# Altium PCB PCB1.PcbDoc
Units mm, origin at the board's own origin, x right, y up, seen from the top; angles counter-clockwise.
Board outline 67.94 x 45.72 mm, 2 copper layers (Top Layer, Bottom Layer); 32 components, 21 nets, 135 pads, 9 vias.
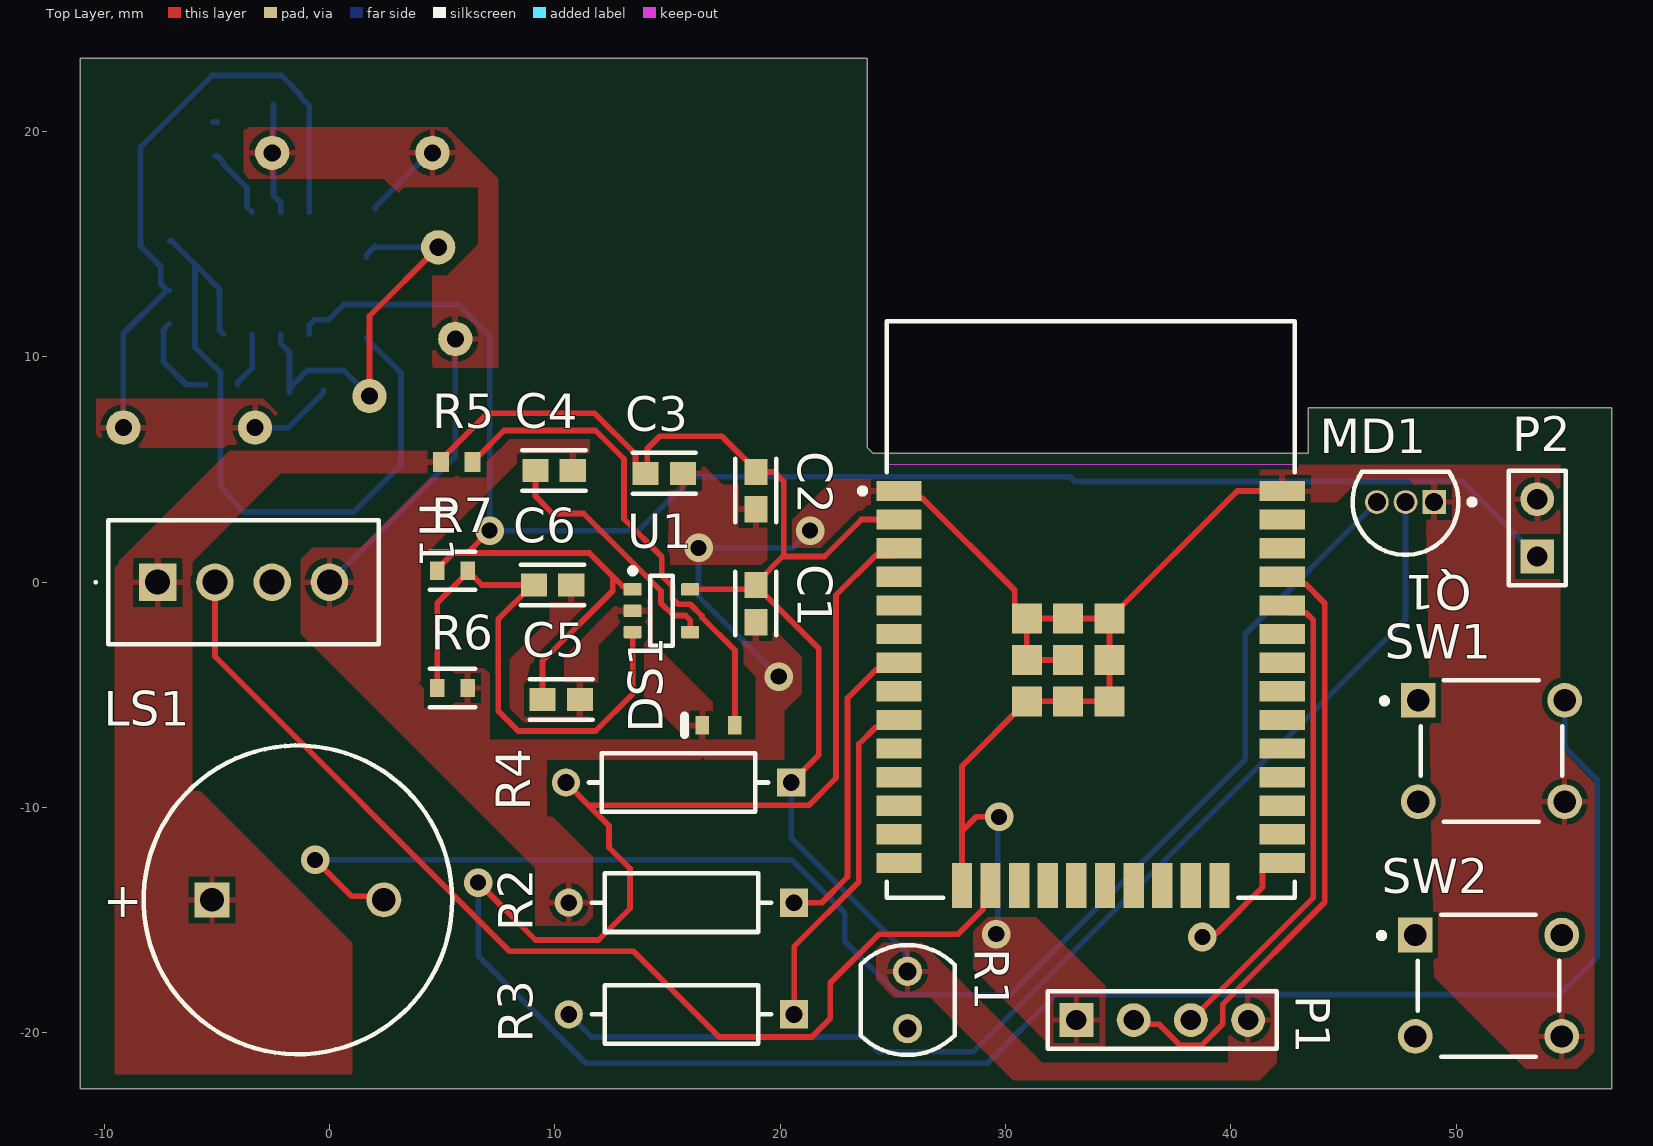
[diagram p0: Top Layer view]
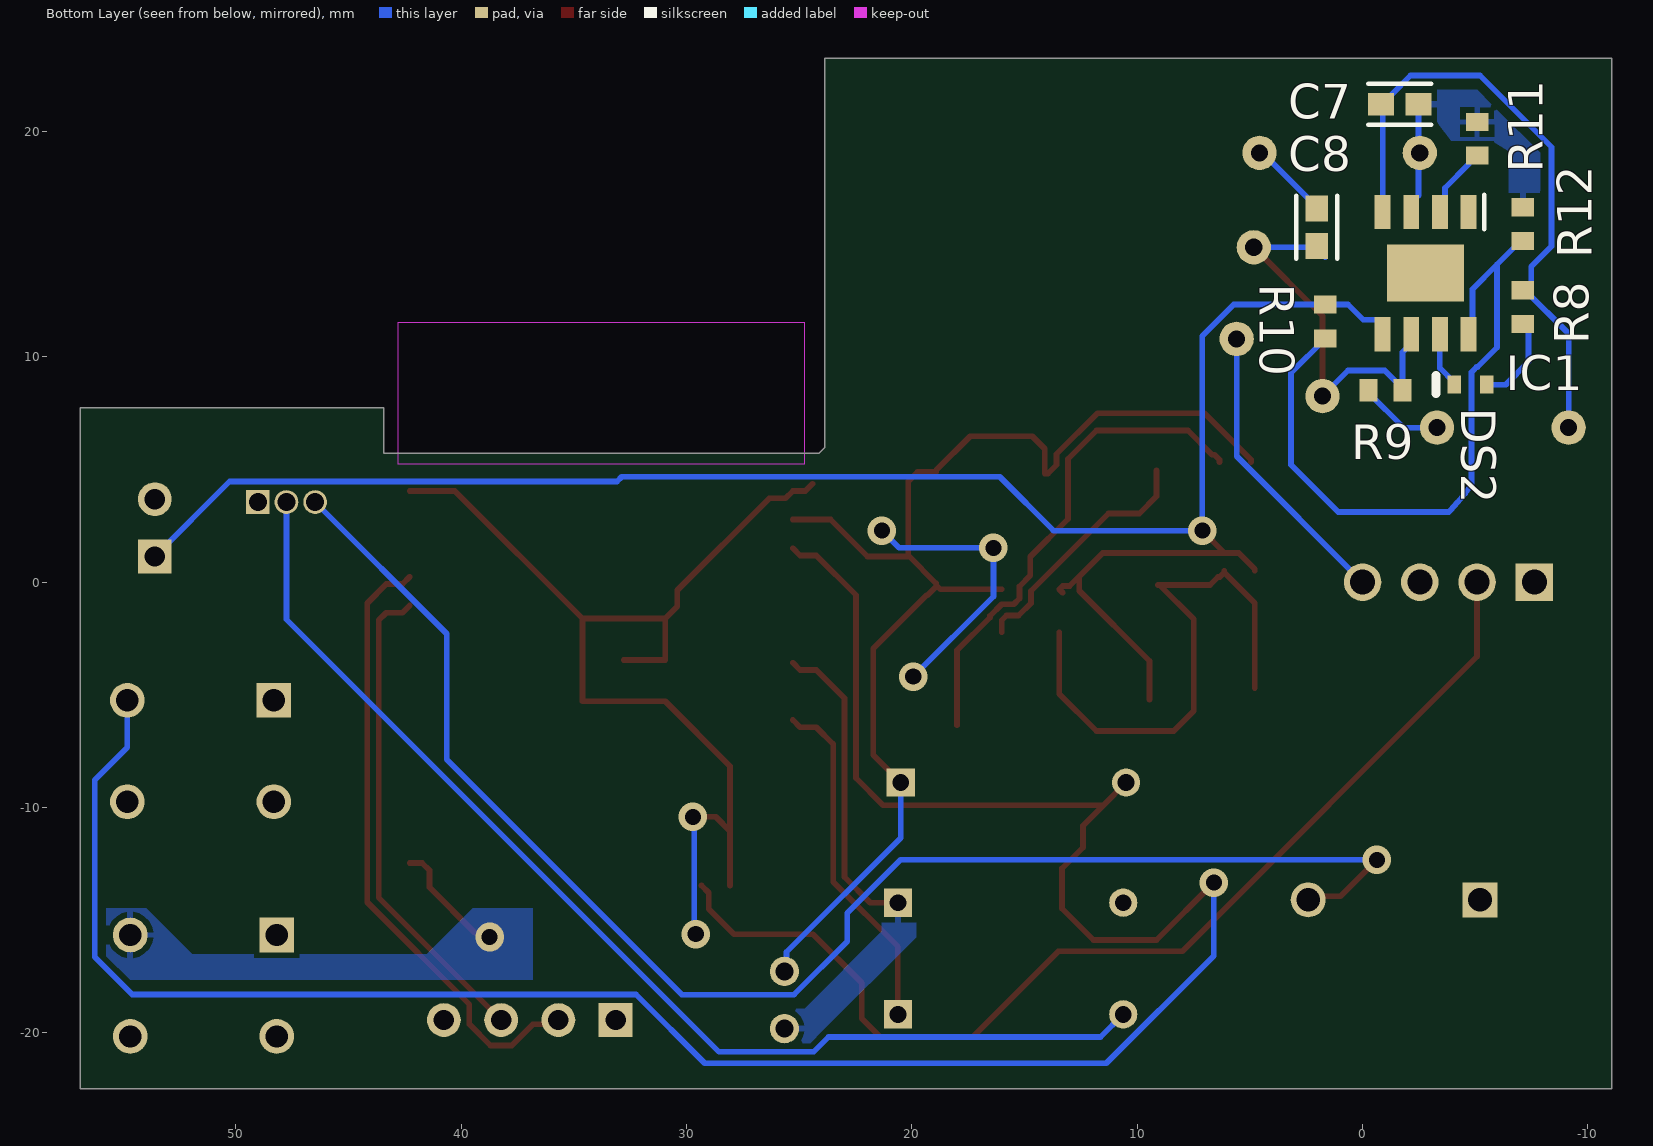
[diagram p1: Bottom Layer view, seen from below]
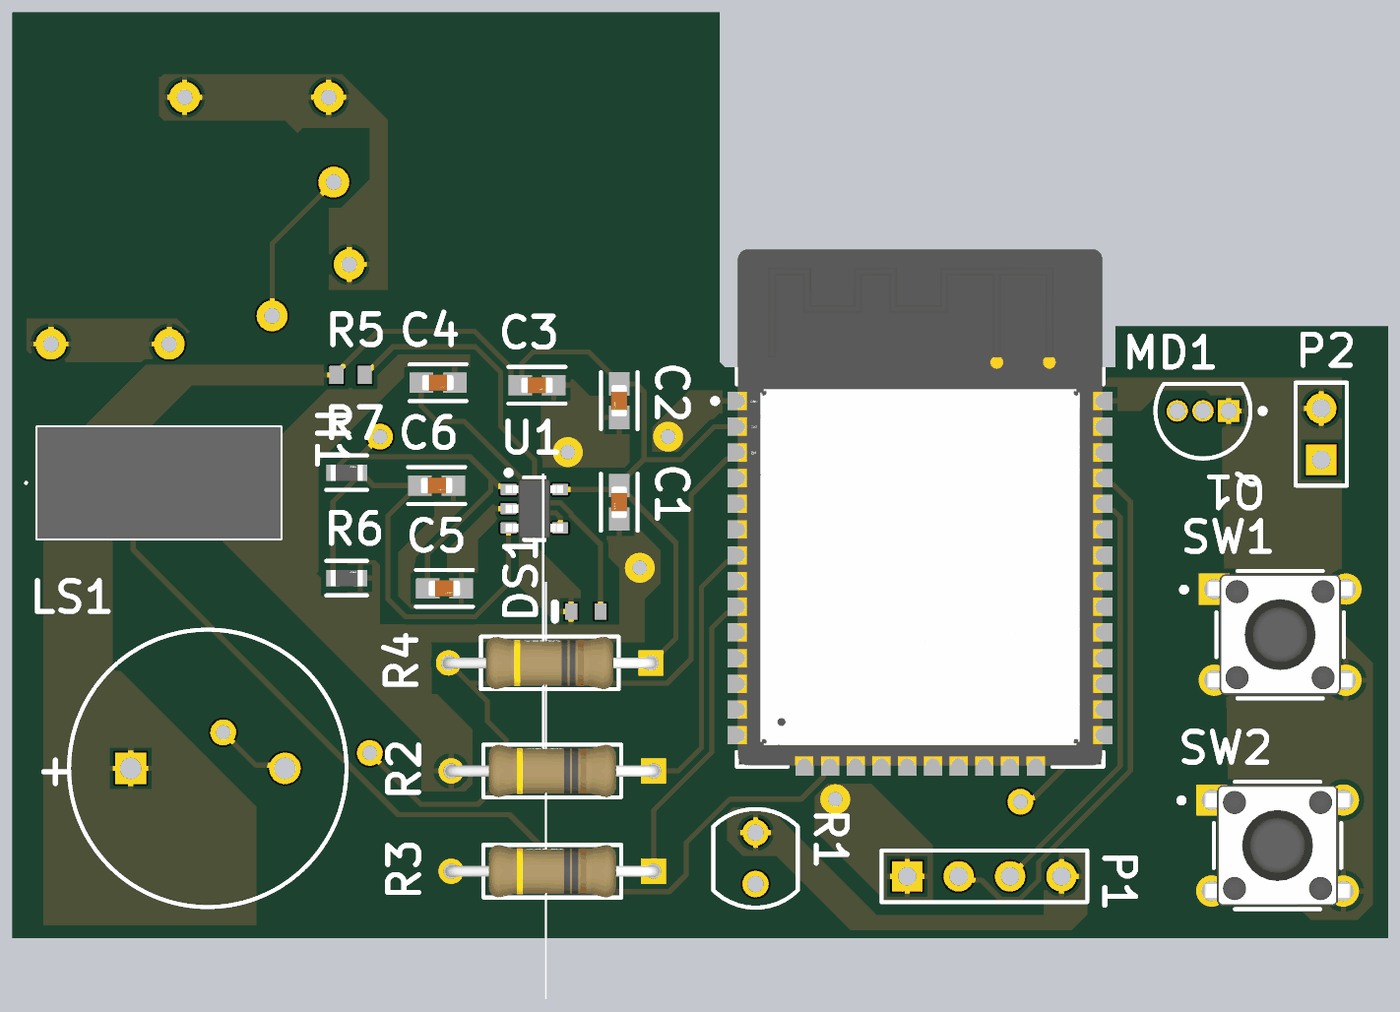
[diagram p2: 3D render of the assembled board from above, using the file's embedded part models]

## Layer stack, top to bottom
Top Solder: solder mask 0.0102, Solder Resist, Dk 3.5
Top Layer: signal copper 0.0356
Dielectric 1: dielectric 0.32, FR-4, Dk 4.8
Bottom Layer: signal copper 0.0356
Bottom Solder: solder mask 0.0102, Solder Resist, Dk 3.5

## Board outline
56.896,7.747 43.434,7.747 43.434,5.715 24.13,5.715 23.876,5.969 23.876,23.241 -11.049,23.241 -11.049,-22.479 56.896,-22.479

## Design rules (kind name [scope] priority, off if disabled: settings)
Clearance [All] p1: gap=0.254 ignorepadtopadclearanceinfootprint=FALSE except(0: Arc-Hole Track-Hole SMDPad-Hole THPad-Hole Via-Hole Fill-Hole Poly-Hole Region-Hole Text-Hole)
PolygonConnect [All] p1: thpad.connectstyle=Relief thpad.reliefconductorwidth=0.254 thpad.reliefentries=4 thpad.polygonreliefangle="90 Angle" thpad.airgapwidth=0.254 smdpad.connectstyle=Relief smdpad.reliefconductorwidth=0.254 smdpad.reliefentries=4 smdpad.polygonreliefangle="90 Angle" smdpad.airgapwidth=0.254 via.connectstyle=Direct via.reliefconductorwidth=0.254 via.reliefentries=4 via.polygonreliefangle="90 Angle" via.airgapwidth=0.254
RoutingVias [All] p1: holewidth=0.711 width=1.27 viastyle="Through Hole" minholewidth=0.711 minwidth=1.27 maxholewidth=0.711 maxwidth=1.27
SolderMaskExpansion [All] p1: expansion=0.102 istentingtop=FALSE
Width [All] p1: maxlimit=0.254 minlimit=0.254 preferedwidth=0.254
30 further rules are at their usual default settings.

## Classes and differential pairs
component class BMS: C7 C8 DS2 IC1 R8 R10 R11 R12
component class Sheet1: C1 C2 C3 C4 C5 C6 DS1 H1 LS1 MD1 P1 P2 Q1 R1 R2 R3 R4 R5 R6 R7 SW1 SW2 U1

## Components (designator, comment, footprint, x,y, rotation, side; value= is the part's Value field where it differs from the comment)
C1 "22uF" FP-GCM188-0_1-IPC_A 18.923,-0.954 r270 top
C2 "100nF" FP-GCM188-0_1-IPC_A 18.923,4.064 r270 top
C3 "2.2uF" FP-GCM188-0_1-IPC_A 14.859,4.826 r0 top
C4 "10nF" FP-GCM188-0_1-IPC_A 9.971,4.953 r0 top
C5 "100nF" FP-GCM188-0_1-IPC_A 10.287,-5.207 r0 top
C6 "1uF" FP-GCM188-0_1-IPC_A 9.906,-0.127 r0 top
C7 "GCM188R91E104KA37D" FP-GCM188-0_1-IPC_A -1.651,21.209 r180 bottom
C8 "GCM188R91E104KA37D" FP-GCM188-0_1-IPC_A 2.032,15.748 r90 bottom
DS1 "TLMS1100-GS08" VISH-TLMX1100_V 17.272,-6.35 r180 top
DS2 "TLMS1100-GS08" VISH-TLMX1100_V -4.789,8.763 r0 bottom
H1 "386" 386 -7.62,0 r0 top
IC1 "CN3085" SOIC127P600X175-9N -2.794,13.716 r270 bottom
LS1 "KPEG242" KINGS-KPEG242-2 -1.397,-14.097 r0 top
MD1 "ESP32-WROOM-32" FP-ESP32-WROOM-32-MFG 33.782,-1.212 r0 top
P1 "Header 4" HDR1X4 33.147,-19.431 r0 top
P2 "Header 2" HDR1X2 53.594,1.143 r90 top
Q1 "MPSA06" ONSC-TO-92-3-29-11 47.752,3.556 r180 top
R1 "VT90N1" EXCE-VT90N1 25.654,-18.542 r270 top
R2 "CFR-25JB-52-10R" FP-CFR-25-MFG 15.621,-14.224 r180 top
R3 "CFR-25JB-52-10R" FP-CFR-25-MFG 15.621,-19.177 r180 top
R4 "CFR-25JB-52-10R" FP-CFR-25-MFG 15.494,-8.89 r180 top
R5 "330" RESC1608X55X25NL10T15 5.653,5.334 r0 top
R6 "1k" FP-RC0603-0_55-IPC_C 5.461,-4.699 r0 top
R7 "1.8k" FP-RC0603-0_55-IPC_C 5.461,0.508 r0 top
R8 "RC0603FR-07330RL" RESC1608X55X25ML10T15 -7.112,12.204 r270 bottom
R9 "RC0603FR-07330RL" RESC1608X55X25ML10T15 -1.016,8.509 r180 bottom
R10 "RC0603FR-07330RL" RESC1608X55X25ML10T15 1.651,11.569 r270 bottom
R11 "RC0603FR-07330RL" RESC1608X55X25ML10T15 -5.08,19.673 r90 bottom
R12 "RC0603FR-07330RL" RESC1608X55X25ML10T15 -7.112,15.887 r90 bottom
SW1 "3-1825910-1" FP-3-1825910-1-MFG 51.562,-7.493 r0 top
SW2 "3-1825910-1" FP-3-1825910-1-MFG 51.435,-17.907 r0 top
U1 "LP2985-33DBVT" DBV0005A_L 14.732,-1.27 r0 top

## Footprints (in the part's own frame and the unit in brackets; to place one, negate y for a bottom-side part, rotate by r counter-clockwise, add the part's x,y. Pads: shape width x height; smd on the part's side, far side on the other; paste and mask are expansions set on the pad)
386 [mm]
  rect 1.665x1.665 hole 1.11: 1(0,0)
  round 1.665 hole 1.11: 2(2.54,0) 3(5.08,0) 4(7.62,0)
  silkscreen extent -2.8,-2.75 9.81,2.75, body extent -2.19,-2.75 9.81,2.75, height 15.6
DBV0005A_L [mm] "SOT23, 5-Leads, Body 3.05x1.75mm, Pitch 0.95mm, IPC High Density"
  rrect18% 0.8x0.55 smd: 1(-1.275,0.95) 2(-1.275,0) 3(-1.275,-0.95) 4(1.275,-0.95) 5(1.275,0.95)
  silkscreen extent -1.4,-1.55 0.5,1.9, body extent -1.42,-1.46 1.42,1.46, height 1.08
EXCE-VT90N1 [mm] "THD, 2-Leads, Body Width 4.17mm (Max), Height 2.29mm"
  round 1.3 hole 0.8: 1(-1.27,0) 2(1.27,0)
  silkscreen extent -2.44,-2.08 2.44,2.08, body extent -2.44,-2.09 2.44,2.09, height 2.29
FP-3-1825910-1-MFG [mm]
  rect 1.54x1.54 hole 0.99 paste-1000 mask+0: 1(-3.25,2.25)
  round 1.54 hole 0.99 paste-1000 mask+0: 2(3.25,2.25) 3(-3.25,-2.25) 4(3.25,-2.25)
  silkscreen extent -4.87,-3.15 3.15,3.15, body extent -4.12,-3.24 4.12,3.24, height 0.25
FP-CFR-25-MFG [mm]
  rect 1.25x1.25 hole 0.75 paste-1000 mask+0: 1(-5,0)
  round 1.25 hole 0.75 paste-1000 mask+0: 2(5,0)
  silkscreen extent -3.98,-1.3 3.98,1.3, body extent -5.72,-1.4 5.72,1.4, height 0.25
FP-ESP32-WROOM-32-MFG [mm]
  rect 2x0.9 smd paste+0 mask+0: 1(-8.5,5.26) 2(-8.5,3.99) 3(-8.5,2.72) 4(-8.5,1.45) 5(-8.5,0.18) 6(-8.5,-1.09) 7(-8.5,-2.36) 8(-8.5,-3.63) 9(-8.5,-4.9) 10(-8.5,-6.17) 11(-8.5,-7.44) 12(-8.5,-8.71) 13(-8.5,-9.98) 14(-8.5,-11.25) 25(8.5,-11.25) 26(8.5,-9.98) 27(8.5,-8.71) 28(8.5,-7.44) 29(8.5,-6.17) 30(8.5,-4.9) 31(8.5,-3.63) 32(8.5,-2.36) 33(8.5,-1.09) 34(8.5,0.18) 35(8.5,1.45) 36(8.5,2.72) 37(8.5,3.99) 38(8.5,5.26)
  rect 0.9x2 smd paste+0 mask+0: 15(-5.715,-12.25) 16(-4.445,-12.25) 17(-3.175,-12.25) 18(-1.905,-12.25) 19(-0.635,-12.25) 20(0.635,-12.25) 21(1.905,-12.25) 22(3.175,-12.25) 23(4.445,-12.25) 24(5.715,-12.25)
  rect 1.33x1.33 smd paste+0 mask+0: 39(-2.835,-4.075) 39(-2.835,-2.24) 39(-2.835,-0.405) 39(-1,-4.075) 39(-1,-2.24) 39(-1,-0.405) 39(0.835,-4.075) 39(0.835,-2.24) 39(0.835,-0.405)
  Keep-Out Layer region: -9,6.45 9,6.45 9,12.75 -9,12.75
  Keep-Out Layer region: -9,6.45 9,6.45 9,12.75 -9,12.75
  silkscreen extent -10.25,-12.8 9.05,12.8, body extent -9.6,-13.35 9.6,12.9, height 0.25
FP-GCM188-0_1-IPC_A [mm]
  rect 1.159x1.012 smd paste+0 mask+0: 1(-0.827,0) 2(0.827,0)
  silkscreen extent -1.41,-0.91 1.41,0.91, body extent -1.91,-1.01 1.91,1.01, height 0.25
FP-RC0603-0_55-IPC_C [mm]
  rect 0.659x0.812 smd paste+0 mask+0: 1(-0.677,0) 2(0.677,0)
  silkscreen extent -1.01,-0.85 1.01,0.85, body extent -1.11,-0.55 1.11,0.55, height 0.25
HDR1X2 [mm] "Connector; Header; 2 Position"
  rect 1.5x1.5 hole 0.9: 1(0,0)
  round 1.5 hole 0.9: 2(2.54,0)
  silkscreen extent -1.27,-1.27 3.81,1.27
HDR1X4 [mm] "Connector; Header; 4 Position"
  rect 1.5x1.5 hole 0.9: 1(0,0)
  round 1.5 hole 0.9: 2(2.54,0) 3(5.08,0) 4(7.62,0)
  silkscreen extent -1.27,-1.27 8.89,1.27
KINGS-KPEG242-2 [mm] "THD, 2-Leads, Dia 13.7mm, Pitch 7.62mm"
  rect 1.55x1.55 hole 1.05: 1(-3.81,0)
  round 1.55 hole 1.05: 2(3.81,0)
  silkscreen extent -6.85,-6.85 6.85,6.85, body extent -6.85,-6.85 6.85,6.85, height 7.6
ONSC-TO-92-3-29-11 [mm] "TO, 3-Leads, Body Dia 4.7mm, Pitch 1.27mm"
  rect 1.05x1.05 hole 0.8: 1(-1.27,0)
  round 1.05 hole 0.8: 2(0,0) 3(1.27,0)
  silkscreen extent -3.08,-1.34 2.35,2.35, body extent -2.35,-1.33 2.36,2.36, height 7.87
RESC1608X55X25ML10T15 [mm] "Chip Resistor, 2-Leads, Body 1.70x0.90mm, IPC Low Density"
  rect 0.8x1 smd: 1(-0.75,0) 2(0.75,0)
  body extent -0.85,-0.45 0.85,0.45, height 0.55
RESC1608X55X25NL10T15 [mm] "Chip Resistor, 2-Leads, Body 1.70x0.90mm, IPC Medium Density"
  rect 0.7x0.9 smd: 1(-0.7,0) 2(0.7,0)
  body extent -0.85,-0.45 0.85,0.45, height 0.55
SOIC127P600X175-9N [mm]
  rect 1.525x0.7 smd: 1(-2.712,1.905) 2(-2.712,0.635) 3(-2.712,-0.635) 4(-2.712,-1.905) 5(2.712,-1.905) 6(2.712,-0.635) 7(2.712,0.635) 8(2.712,1.905)
  rect 2.513x3.402 smd: 9(0,0)
  silkscreen extent -3.47,2.61 -1.95,2.61, body extent -3,-2.45 3,2.45, height 1.75
VISH-TLMX1100_V [mm] "SMD, 2-Leads, Body 1.6x0.8mm"
  rect 0.6x0.8 smd: 1(-0.725,0) 2(0.725,0)
  silkscreen extent 1.53,-0.4 1.53,0.4, body extent -0.8,-0.4 0.8,0.4, height 0.65

## Part data
C1 C3 C4 C6 C7 C8: library part CMP-06035-025750-1, "Ceramic Capacitor for Automotive 100nF  ±10% 25VDC X8R 0603 Paper T/R", Capacitance=100nF, Case/Package=0603, Dielectric=X8R, Max Operating Temperature=150°C, Min Operating Temperature=-55°C, Tolerance=10%, Voltage Rating (DC)=25V, Depth=0.8mm, Lead Free="Lead Free", Length=1.6mm, Packaging="Tape and Reel"
C2 C5: library part CMP-06035-025750-1, "Ceramic Capacitor for Automotive 100nF  ±10% 25VDC X8R 0603 Paper T/R", Case/Package=0603, Dielectric=X8R, Max Operating Temperature=150°C, Min Operating Temperature=-55°C, Tolerance=10%, Voltage Rating (DC)=25V, Capacitance=100nF, Depth=0.8mm, Lead Free="Lead Free", Length=1.6mm, Packaging="Tape and Reel"
DS1 DS2: library part CMP-1666-00027-1, "LED, RED, 2.1 V, -40 to 100 degC, 2-Pin SMD (0603), RoHS, Tape and Reel", Capacitance="12 pF", Case Code (Imperial)=0603, Case Code (Metric)=1608, Max Operating Temperature=125degC, Min Operating Temperature=-55degC, Package Quantity=4000, Resistance="100000000000 Ohm", Tolerance=5%, Type (Capacitors)=C0G, Voltage Rating="50 V", Case/Package=0603, ComponentLink1Description="Manufacturer URL", ComponentLink1URL=http://www.vishay.com/, ComponentLink2Description=Datasheet, ComponentLink2URL=http://www.vishay.com/docs/83173/tlmb1100.pdf, DatasheetVersion="Rev. 2.7, 03/2016", Height="0.8 mm", Length="1.6 mm", Mount="Surface Mount", PackageDescription="2-Pin Surface Mount Device, Body 1.6 x 0.8 mm", PackageReference=TLMX1100, Packaging="Tape and Reel", Pins=2, Radiation Hardening=No, REACH SVHC="No SVHC", RoHSCompliant=True, Voltage Rating (DC)="50 V", Width="0.8 mm"
H1: "Hardware", Manufacturer_Name=Adafruit, Mouser Part Number=485-386, Arrow Part Number=386, Arrow Price/Stock=https://www.arrow.com/en/products/386/adafruit-industries?region=nac, Datasheet Link=https://datasheet.datasheetarchive.com/originals/distributors/DKDS-1/1982.pdf, Height=15.5mm, Manufacturer_Part_Number=386, Mouser Price/Stock=https://www.mouser.co.uk/ProductDetail/Adafruit/386?qs=GURawfaeGuDbeGFpZ2393w%3D%3D
IC1: "Integrated Circuit", Manufacturer_Name=Consonance, Datasheet Link=http://www.consonance-elec.com/pdf/datasheet/DSE-CN3085.pdf, Height=1.75mm, Manufacturer_Part_Number=CN3085
LS1: library part CMP-2000-06518-1, "Piezo Indicator, 4100 Hz, 3 to 16 V, -20 to 70 degC, 2-Pin THD, RoHS", Current - Max=7A, Frequency Range=3600to4600Hz, Manufacturer=KingstateElectronicsCorp., Maximum Resonant Frequency=4600Hz, Maximum Supply Current=7mA, Operating Temperature=-20to70°C, Package Description="2-Pin Through Hole Device, Body Dia 13.7 mm, Pitch 7.62 mm", PartNumber=KPE-242, Typical Operating Supply Voltage=12Vdc, Category=AudioIndicatorsandAlerts, Datasheet URL=https://datasheet.ciiva.com/11776/0900766b8068f3a2-11776713.pdf, Datasheet Version=01/2006, Manufacturer URL=http://www.kingstate.com.tw/index.php/en/, Minimum Sound Pressure=70dBA, Mounting=ThroughHole, Mounting Technology=ThroughHole, Package Reference=KPEG242, Product Diameter=13.7mm, Product Height=7.6mm, Technology=Piezo, Termination Method=Pin, Tone Mode=Continuous, Type=Indicator
MD1: library part CMP-194065-000008-1, "RX TXRX MOD WIFI SURFACE MOUNT", Case/Package=SMD/SMT, Frequency=2.5GHz, Max Operating Temperature=85°C, Min Operating Temperature=-40°C, Operating Supply Voltage=3.6V, Package Quantity=550, Data Rate=150Mbps, Mount="Surface Mount", Packaging="Cut Tape", Sensitivity=-98dBm, Weight=0.088185oz
P1: "Header, 4-Pin", LatestRevisionDate=17-Jul-2002, LatestRevisionNote="Re-released for DXP Platform.", Publisher="Altium Limited"
P2: "Header, 2-Pin", LatestRevisionDate=17-Jul-2002, LatestRevisionNote="Re-released for DXP Platform.", Publisher="Altium Limited"
Q1: library part CMP-1048-01429-1, "Amplifier Transistor, 3-Pin TO-92, Bulk Box", Manufacturer="On Semiconductor", ComponentLink1Description="Manufacturer URL", ComponentLink1URL=http://www.onsemi.com/, ComponentLink2Description=Datasheet, ComponentLink2URL=http://www.onsemi.cn/pub_link/Collateral/MPSA05-D.PDF, ComponentLink3Description="Package Specification", ComponentLink3URL=http://www.onsemi.cn/pub_link/Collateral/2N6426-D.PDF, DatasheetVersion="Rev. 3", fT Min (MHz)=100, IC Continuous (A)=0.5, Mounting Technology="Through Hole", Note1=0, PackageDescription="3-Pin Transistor Outline, Body 4.825 x 3.685 mm, Pitch 1.27 mm", PackageReference=TO-92-3-29-11_AM_SL, PackageVersion="Rev. AM", Packing="Bulk Box", PartNumber=MPSA06, Polarity=NPN, RoHS=FALSE
R1: library part CMP-2000-07406-1, "Photoconductive Resistor, 200 kOhm, 100 V, 80 mW, -40 to 75 degC, 2-Pin THD, RoHS", Dark Resistance=200kohm, Manufacturer="Excelitas Technology", Operating Temperature Max=75°C, Operating Temperature Min=-40°C, Package Description="2-Pin Through Hole Device, Body Width 4.17 mm (Max), Height 2.29 mm", Power Rating=80mW, Resistance @ Lux=12kohm, Resistor Case Style=-, Voltage Rating=100V, Datasheet URL=http://datasheet.octopart.com/VT90N1-Excelitas-datasheet-10388451.pdf, Datasheet Version=09/2006, Manufacturer URL=http://www.excelitas.com/Pages/Index.aspx, Mounting Technology=ThroughHole, Package Reference=VT90N1, Packaging=Each, Product Range=-, SVHC=Cadmiumchloride(15-Jun-2015)
R2 R3 R4: library part CMP-03413-000009-1, "RES 10 OHM 1/4W 5% AXIAL", Case/Package=Axial, Max Operating Temperature=155°C, Max Power Dissipation=250mW, Min Operating Temperature=-55°C, Package Quantity=200, Resistance=10R, Resistor Type="Carbon Film", Temperature Coefficient=500ppm/°C, Tolerance=5%, Length=0.248inch, Number of Terminations=2, Packaging=Bulk, RoHS Compliant=Yes, Series="Carbon Film"
R5 R8 R9 R10 R11 R12: library part CMP-1659-00020-2, "Chip Resistor, 330 Ohm, +/- 1%, 0.1 W, -55 to 155 degC, 0603 (1608 Metric), RoHS, Tape and Reel", Capacitance="47 uF", Case Code (Imperial)=2917, Case Code (Metric)=7343, Max Operating Temperature=125degC, Min Operating Temperature=-55degC, Package Quantity=500, Tolerance=10%, Voltage Rating="16 V", Case/Package=2917, ComponentLink1Description="Manufacturer URL", ComponentLink1URL=http://www.yageo.com/, ComponentLink2Description=Datasheet, ComponentLink2URL=http://www.yageo.com/documents/recent/PYu-RC_Group_51_RoHS_L_04.pdf, DatasheetVersion="Rev. 4, 02/2016", ESR="800 mohm", Height="3.1 mm", Length="7.3 mm", Mount="Surface Mount", PackageDescription="2-Pin Surface Mount Device, Body 1.6 x 0.8 mm", PackageReference=0603, Packaging="Tape and Reel", Pins=2, Radiation Hardening=No, REACH SVHC="No SVHC", RoHSCompliant=True, Voltage Rating (DC)="16 V", Width="4.3 mm"
R6 R7: library part CMP-2000-06931-2, "RES SMD 1.8K OHM 1% 1/10W 0603", Case Code (Imperial)=0603, Case Code (Metric)=1608, Max Operating Temperature=155°C, Max Power Dissipation=100mW, Min Operating Temperature=-55°C, Package Quantity=5000, Resistance=1.8kR, Resistance Tolerance=1%, Resistor Type="Thick Film", Temperature Coefficient=100ppm/°C, Voltage Rating=50V, Case/Package=0603, Construction=Rectangular, Depth=0.8mm, Features="Moisture Resistant", Height=0.45mm, Lead Free="Lead Free", Length=1.6mm, Military Standard=Not, Number of Pins=2, Number of Terminations=2, Packaging="Tape and Reel", Power Rating=100mW, REACH SVHC="No SVHC", RoHS Compliant=Yes, Series=RC, Size Code=0603, Technology="THICK FILM", Termination=SMD/SMT, Tolerance=1%, Voltage Rating (DC)=50V, Width=0.8mm
SW1 SW2: library part CMP-03407-000001-1, "SWITCH TACTILE SPST-NO 0.05A 24V", Contact Current Rating=50mA, Contact Resistance=100mΩ, Manufacturer="TE Connectivity", Operating Force=160gf, Package=0, Temperature="-35°C to +85°C", Temperature Range High=+85°C, Temperature Range Low=-35°C, Automotive=No, Category=Switch, ComponentLink2Description=Datasheet, ComponentLink2URL=https://www.te.com/commerce/DocumentDelivery/DDEController?Action=srchrtrv&DocNm=1825910&DocType=Customer+Drawing&DocLang=English, Device Class L1=Electromechanical, Device Class L2=Switches, Device Class L3="Tactile Switches", Digikey Description="SWITCH TACTILE SPST-NO 0.05A 24V", Electromechanical Life=100000Cycles, Height=17.3mm, Lead Free=Yes, Manufacturer Part Number=3-1825910-1, Mount="Through Hole", Octopart=https://octopart.com/3-1825910-1-te+connectivity-46506874, RoHS=TRUE, Throw Configuration=SPST-NO
U1: library part CMP-0758-00030-2, "Single Output Low Noise LDO, 150 mA, Fixed 3.3 V Output, 1.5% Tolerance, 2.2 to 16 V Input, Low IQ, 5-Pin SOT-23 (DBV), -40 to 125 degC, Green (RoHS & no Sb/Br), Tape and Reel", Manufacturer="Texas Instruments", Operating Temperature Range (degC)="-40 to 125", Accuracy (%)=1.5, ComponentLink1Description="Manufacturer URL", ComponentLink1URL=http://www.ti.com/, ComponentLink2Description=Datasheet, ComponentLink2URL=http://www.ti.com/lit/ds/symlink/lp2985-50.pdf, ComponentLink3Description="Package Specification", ComponentLink3URL=http://www.ti.com/litv/pdf/mpds018j, DatasheetVersion=SLVS522N, Fixed Output Options (V)=3.3, Iout (Max) (A)=0.15, Iq (Typ) (mA)=0.85, Mounting Technology="Surface Mount", Output Options="Fixed Output", PackageDescription="5-Pin Plastic Small Outline, Body 2.9 x 1.6 mm, Pitch 0.95 mm", PackageReference=DBV0005A, PackageVersion=4073253-4/L, Packing="Tape and Reel", PartNumber=LP2985-33DBVT, RoHS=TRUE, Vdo (Typ) (mV)=280, Vin (V)="2.2 to 16"

## Free pads (board coordinates)
  round 1.524 hole 0.762: 6(-2.54,19.05) 7(4.572,19.05) 8(5.588,10.795) 9(1.778,8.255) 10(4.826,14.859) 11(-3.302,6.858) 12(-9.144,6.858)

## Via types
v1: diameter 1.27, hole 0.711, Top Layer to Bottom Layer, 9 vias

## Nets (pads, with @x,y where several pads share a name; then routed paths per layer and width w, separated by ;. In a path a pad name is that pad's centre, name@x,y a point inside that pad or via, vN(x,y) a via of type N, cw(c..) or ccw(c..) an arc to the next point about the centre after c; other vN are vias at no path point)
3.3V: C1.1 C2.1 C3.1 H1.1 LS1.1 MD1.2 P1.4 R1.1 R4.1 R5.1 U1.5 | length 54.6
  Top Layer w0.254: R5.1 4.953,5.434 7.012,7.493 11.767,7.493 13.58,5.68 13.58,5.205 13.959,4.826 14.106,4.826 14.106,5.921 14.662,6.477 17.41,6.477 18.923,4.964 C2.1 19.747,4.891 20.156,4.482 20.156,1.18 18.923,-0.054 C1.1 ; U1.5 18.73,-0.32 C1.1 ; 20.193,1.143 21.971,1.143 23.606,2.778 MD1.2 ; R4.1 21.717,-7.667 21.717,-2.95 19.346,-0.579 19.302,-0.579 18.923,-0.2 C1.1
  Bottom Layer w0.254: R4.1 20.494,-11.35 25.56,-16.416 25.56,-17.178 R1.1
BAT+: C5.1 IC1.5 P2.1 R7.1 R10.1 U1.1 | length 85
  Top Layer w0.254: R7.1 4.784,0.585 5.495,1.295 6.121,1.295 ; v1(7.112,2.286) 6.121,1.295 ; C5.1 9.46,-3.494 12.573,-0.381 12.573,0.254 ; U1.1@13.309,-0.468 U1.1 13.309,-0.172 12.999,-0.172 12.573,0.254 ; 6.121,1.295 11.532,1.295 12.573,0.254
  Bottom Layer w0.254: IC1.5 -0.889,11.416 -0.666,11.639 -0.034,11.639 0.646,12.319 R10.1 5.715,12.319 7.112,10.922 v1(7.112,2.286) 13.716,2.286 16.105,4.675 32.87,4.675 33.084,4.462 50.275,4.462 P2.1
BUZZER_PIN: MD1.9 R3.1 | length 15.4
  Top Layer w0.254: R3.1 20.621,-16.165 23.495,-13.291 23.495,-7.18 24.24,-6.435 24.959,-6.435 MD1.9
DHT_11: H1.2 MD1.16 | length 48.8
  Top Layer w0.254: H1.2 -5.08,-3.302 8.001,-16.383 13.501,-16.383 17.301,-20.183 21.404,-20.183 22.225,-19.362 22.225,-17.78 24.384,-15.621 27.897,-15.621 29.014,-14.504 29.014,-13.785 MD1.16
GND: C1.2 C2.2 C3.2 C4.2 C5.2 C6.2 C7.2 C8.2 DS1.2 H1.4 IC1.3 MD1.1 MD1.15 MD1.38 MD1.39 P1.1 P2.2 pad.6 pad.7 pad.8 Q1.1 R2.2 R6.2 R11.2 R12.2 SW1.4 SW2.4 U1.2 | length 85.3
  Top Layer w0.254: pad.8 pad.8@5.588,11.139 ; MD1.1@24.409,4.371 24.732,4.048 MD1.1 25.605,3.725 26.324,3.725 30.409,-0.36 30.409,-1.079 MD1.39@30.947,-1.617 ; MD1.15 28.067,-11.049 ; v1(29.718,-10.414) 28.702,-10.414 28.067,-11.049 ; MD1.39@32.782,-3.452 30.947,-3.452 MD1.39@30.947,-1.617 ; MD1.38 40.282,4.048 MD1.39@34.617,-1.617 ; 28.067,-11.049 28.067,-8.167 30.947,-5.287 32.782,-5.287 34.617,-5.287 34.617,-3.452 MD1.39@34.617,-1.617 ; MD1.39@30.947,-1.617 32.782,-1.617 MD1.39@34.617,-1.617
  Bottom Layer w0.254: R11.2@-5.18,20.423 R11.2 R11.2@-4.98,20.423 ; C7.2 -2.478,17.159 -2.159,16.84 IC1.3 ; H1.4 5.588,5.588 pad.8 ; C8.2 2.032,16.648 4.434,19.05 pad.7 ; v1(19.939,-4.191) 16.383,-0.635 v1(16.383,1.524) 20.574,1.524 v1(21.336,2.286) ; v1(29.591,-15.621) 29.654,-15.557 29.654,-10.477 v1(29.718,-10.414)
LDR: MD1.7 R1.2 R2.1 | length 14.4
  Top Layer w0.254: R2.1 21.844,-14.224 22.987,-13.081 22.987,-5.148 24.24,-3.895 24.959,-3.895 MD1.7
  Bottom Layer w0.254: R2.1 R2.1@21.119,-14.722
NetC4_1: C4.1 U1.4 | length 11.1
  Top Layer w0.254: C4.1 9.144,3.81 9.906,3.048 11.274,3.048 14.718,-0.396 14.718,-0.934 15.268,-1.484 15.806,-1.484 16.007,-1.685 U1.4
NetC6_1: C6.1 R6.1 R7.2 U1.3 | length 25.1
  Top Layer w0.254: R6.1 4.784,-0.922 R7.2@6.138,0.431 ; U1.3 13.457,-4.958 11.811,-6.604 8.382,-6.604 7.493,-5.715 7.493,-1.64 9.006,-0.127 C6.1 6.773,-0.127 6.417,0.229 6.34,0.229 R7.2@6.138,0.431 ; R7.2@6.138,0.431 R7.2 R7.2@6.138,0.431
NetC8_1: C8.1 IC1.6 pad.9 pad.10 R9.2 | length 18.5
  Top Layer w0.254: pad.9 1.778,11.811 pad.10 pad.10@4.763,14.859
  Bottom Layer w0.254: IC1.6 -2.159,10.592 -1.766,10.198 R9.2@-1.766,8.609 ; R9.2@-1.766,8.409 R9.2 R9.2@-1.766,8.609 ; C8.1@1.653,14.43 1.653,14.542 C8.1 2.094,14.859 pad.10 ; pad.9 0.643,9.39 -0.985,9.39 R9.2@-1.766,8.609
NetDS1_1: DS1.1 R5.2 | length 22.1
  Top Layer w0.254: R5.2 6.353,5.434 6.576,5.657 6.676,5.657 7.75,6.731 11.811,6.731 13.072,5.47 13.072,2.803 14.746,1.129 14.746,0.294 15.226,-0.186 15.226,-0.724 15.478,-0.976 16.016,-0.976 16.536,-1.496 16.536,-1.564 17.997,-3.025 DS1.1
NetDS2_1: DS2.1 R8.2 | length 4.1
  Bottom Layer w0.254: R8.2 -7.366,11.2 -7.366,9.779 -6.35,8.763 DS2.1
NetDS2_2: DS2.2 IC1.7 | length 2.5
  Bottom Layer w0.254: DS2.2 -4.064,8.863 -3.429,9.498 IC1.7
NetIC1_2: IC1.2 R11.1 | length 3.2
  Bottom Layer w0.254: R11.1 -4.98,18.923 -4.707,18.65 -4.707,18.55 -3.652,17.495 -3.652,16.651 IC1.2
NetIC1_8: IC1.8 R10.2 R12.1 | length 31.1
  Bottom Layer w0.254: R12.1 -7.012,15.137 -5.969,14.094 ; IC1.8 -4.876,11.181 -4.876,13.001 -5.969,14.094 ; R10.2 3.175,9.295 3.175,5.207 1.083,3.115 -3.82,3.115 -3.894,3.189 cw(c2.723,9.659) -4.833,4.316 -4.833,9.321 -4.907,9.395 -5.056,9.544 -5.099,9.544 -5.969,10.414 -5.969,14.094
NetLS1_2: LS1.2 Q1.3 | length 66.5
  Top Layer w0.254: v1(-0.635,-12.319) 0.982,-13.936 2.252,-13.936 LS1.2
  Bottom Layer w0.254: v1(-0.635,-12.319) 20.505,-12.319 22.866,-14.68 22.866,-15.942 25.227,-18.303 25.715,-18.303 ; 25.679,-18.303 25.715,-18.303 ; Q1.3 40.64,-2.286 40.64,-7.874 30.211,-18.303 25.715,-18.303
NetMD1_3: MD1.3 R4.2 SW1.2 | length 107.5
  Top Layer w0.254: v1(6.604,-13.335) 9.144,-15.875 11.938,-15.875 13.335,-14.478 13.335,-12.7 12.41,-11.775 12.41,-10.806 11.5,-9.896 ; R4.2@10.224,-8.89 R4.2 11.5,-9.896 ; MD1.3 24.959,1.185 24.24,1.185 22.479,-0.576 22.479,-8.694 21.277,-9.896 11.5,-9.896
  Bottom Layer w0.254: v1(6.604,-13.335) 6.604,-16.583 11.372,-21.351 29.188,-21.351 32.239,-18.3 54.598,-18.3 56.261,-16.637 56.261,-8.779 54.812,-7.33 SW1.2
NetMD1_25: MD1.25 SW2.2 | length 5.3
  Top Layer w0.254: v1(38.735,-15.748) 38.929,-15.554 39.394,-15.554 41.409,-13.539 41.409,-12.785 41.732,-12.462 MD1.25
NetQ1_2: Q1.2 R3.2 | length 51
  Bottom Layer w0.254: R3.2 11.627,-20.183 23.699,-20.183 24.359,-20.843 28.56,-20.843 47.752,-1.651 Q1.2
Rx: MD1.35 P1.2 | length 27.7
  Top Layer w0.254: P1.2 35.877,-19.621 36.818,-19.621 37.759,-20.562 38.695,-20.562 39.636,-19.621 39.636,-18.74 44.171,-14.205 44.171,-0.932 43.324,-0.085 42.605,-0.085 MD1.35
Tx: MD1.34 P1.3 | length 21.6
  Top Layer w0.254: P1.3 43.663,-13.995 43.663,-1.694 43.324,-1.355 42.605,-1.355 MD1.34
VCC: C7.1 IC1.4 pad.11 pad.12 R8.1 R9.1 | length 31.7
  Bottom Layer w0.254: pad.12 -9.144,11.022 R8.1@-7.212,12.954 ; R8.1 R8.1@-7.212,12.954 ; pad.11 -1.817,6.858 -0.266,8.409 R9.1 ; IC1.4 -0.889,21.144 -1.277,21.532 -1.277,21.632 -2.123,22.479 -5.207,22.479 -8.382,19.304 -8.382,14.908 -7.485,14.011 -7.485,13.227 R8.1@-7.212,12.954
pads on no net: H1.3 IC1.1 IC1.9 MD1.4 MD1.5 MD1.6 MD1.8 MD1.10 MD1.11 MD1.12 MD1.13 MD1.14 MD1.17 MD1.18 MD1.19 MD1.20 MD1.21 MD1.22 MD1.23 MD1.24 MD1.26 MD1.27 MD1.28 MD1.29 MD1.30 MD1.31 MD1.32 MD1.33 MD1.36 MD1.37 SW1.1 SW1.3 SW2.1 SW2.3

## Polygon pours and split planes (outlines as drawn)
GND on Top Layer "GND_L01_P028" (solid, pour order 28): 5.207,20.193 7.493,17.907 7.493,9.525 4.445,9.525 4.572,9.652 4.572,13.589 5.207,13.589 6.604,14.986 6.604,17.526 3.302,17.526 3.048,17.272 2.413,17.907 -3.556,17.907 -3.81,18.161 -3.81,20.066 -3.683,20.066 -3.556,20.193 -3.683,20.066 -3.556,20.193
VCC on Top Layer "VCC_L01_P027" (solid, pour order 27): -2.794,8.001 -2.286,7.493 -2.286,6.35 -2.667,5.969 -9.779,5.969 -10.351,6.54 -10.351,8.128 -10.16,8.128 -9.906,8.128 -2.921,8.128
3.3V on Top Layer "3.3V_L01_P026" (solid, pour order 26): 24.257,-16.002 24.257,-17.653 25.019,-18.415 26.67,-18.415 30.353,-22.098 41.275,-22.098 42.037,-21.336 42.037,-18.034 40.64,-18.034 39.878,-18.796 39.878,-21.336 31.623,-21.336 26.289,-16.002
3.3V on Top Layer "3.3V_L01_P022" (solid, pour order 22): 5.461,4.826 -2.159,4.826 -6.096,0.889 -6.096,0.809 -9.318,0.809 -9.398,0.889 -4.445,5.842 5.461,5.842
3.3V on Top Layer "3.3V_L01_P021" (solid, pour order 21): -6.109,1.278 -8.644,1.278 -8.763,1.397 -9.525,0.635 -9.525,-21.844 1.016,-21.844 1.016,-16.002 -5.715,-9.271 -5.969,-9.271 -6.096,-9.144 -6.096,1.27
GND on Top Layer "GND_L01_P017" (solid, pour order 17): 4.064,1.27 4.064,-4.572 1.143,-1.651
GND on Top Layer "GND_L01_P016" (solid, pour order 16): 18.288,-1.143 18.288,-3.556 18.923,-4.191 18.923,-6.985 18.904,-7.004 16.995,-7.004 16.995,-7.366 16.487,-7.874 20.193,-7.874 20.193,-5.715 20.955,-4.953 20.955,-3.302 19.431,-1.778 19.431,-1.143
GND on Top Layer "GND_L01_P015" (solid, pour order 15): 11.557,4.445 10.033,4.445 10.033,5.715 8.763,5.715 1.27,-1.778 1.27,1.524 1.397,1.524 4.572,4.699 6.985,4.699 6.985,5.334 8.001,6.35 11.557,6.35
GND on Top Layer "GND_L01_P014" (solid, pour order 14): 9.144,-12.7 9.144,-15.24 11.303,-15.24 11.684,-14.859 11.684,-12.192 9.906,-10.414 9.652,-10.414 9.652,-8.001 9.779,-7.874 4.318,-7.874
GND on Top Layer "GND_L01_P013" (solid, pour order 13): 16.995,-5.696 16.995,-7.366 16.487,-7.874 6.477,-7.874 6.477,-6.985 15.919,-6.985
GND on Top Layer "GND_L01_P012" (solid, pour order 12): 10.033,0.508 9.779,0.254 9.779,-1.651 8.001,-3.429 8.001,-5.588 8.636,-6.223 11.43,-6.223 11.938,-5.715 11.938,-2.794 13.081,-1.651 13.208,-1.778 13.97,-1.778 13.97,-5.08 16.002,-7.112 17.018,-7.112 17.018,-5.334 14.351,-2.667 14.351,-0.762 12.954,-0.762 10.414,-3.302 10.414,-5.969 8.999,-5.969 8.636,-4.953 8.89,-3.683 11.557,-1.016 11.557,0.508 11.176,0.508 9.906,0.508
GND on Top Layer "GND_L01_P011" (solid, pour order 11): -0.762,1.524 -1.27,1.016 -1.27,-2.286 4.572,-8.128 7.112,-8.128 7.112,-4.064 6.858,-3.81 5.461,-3.81 5.461,-5.588 4.191,-5.588 4.191,-4.699 1.27,-1.778 1.27,1.524
GND on Top Layer "GND_L01_P010" (solid, pour order 10): 26.289,4.572 22.352,4.572 20.447,2.667 20.447,1.397 21.844,1.397 23.876,3.429 26.289,3.429
GND on Top Layer "GND_L01_P009" (solid, pour order 9): 15.05,5.461 15.05,2.469 14.986,0.762 19.431,0.762 19.431,3.81 19.241,4.318 17.462,4.318 16.319,5.461
GND on Top Layer "GND_L01_P008" (solid, pour order 8): 29.083,-14.859 28.575,-15.367 28.575,-17.145 32.131,-20.701 34.417,-20.701 34.417,-17.907 31.369,-14.859
GND on Top Layer "GND_L01_P006" (solid, pour order 6): 41.275,3.556 44.704,3.556 45.72,4.572 47.879,4.572 48.514,3.937 48.514,2.54 48.531,2.54 48.768,2.777 49.801,2.777 49.801,5.097 49.911,5.207 41.275,5.207
GND on Top Layer "GND_L01_P000" (solid, pour order 0): 48.635,5.207 54.61,5.207 54.61,-7.366 56.134,-8.89 56.134,-20.828 55.372,-21.59 53.086,-21.59 49.022,-17.526
GND on Bottom Layer "GND_L02_P029" (solid, pour order 29): -1.905,21.844 -5.08,21.844 -7.874,19.05 -7.874,16.002 -7.747,15.875 -6.477,15.875 -6.477,19.126 -5.737,19.591 -3.937,19.591 -3.175,20.574 -1.905,20.574
NetMD1_25 on Bottom Layer "NETMD1_25_L02_P024" (solid, pour order 24): 36.83,-14.478 39.497,-14.478 41.529,-16.51 51.943,-16.51 53.975,-14.478 55.753,-14.478 55.753,-16.637 54.737,-17.653 36.83,-17.653
LDR on Bottom Layer "LDR_L02_P023" (solid, pour order 23): 19.819,-13.533 19.812,-13.54 19.812,-15.748 24.638,-20.574 26.543,-20.574 26.543,-19.177 26.289,-18.923 24.765,-18.923 21.336,-15.494 21.336,-13.589 19.812,-13.589

## Text inside footprints (layer, text, board x,y; h text height)
LS1: Top Overlay "+" at -10.033,-14.859 h1.52